# Altium PCB Mouse_Send.PcbDoc
Units mil, origin at the board's own origin, x right, y up, seen from the top; angles counter-clockwise.
Board outline 1771.65 x 2952.76 mil, 2 copper layers (Top Layer, Bottom Layer); 75 components, 53 nets, 303 pads, 192 vias.
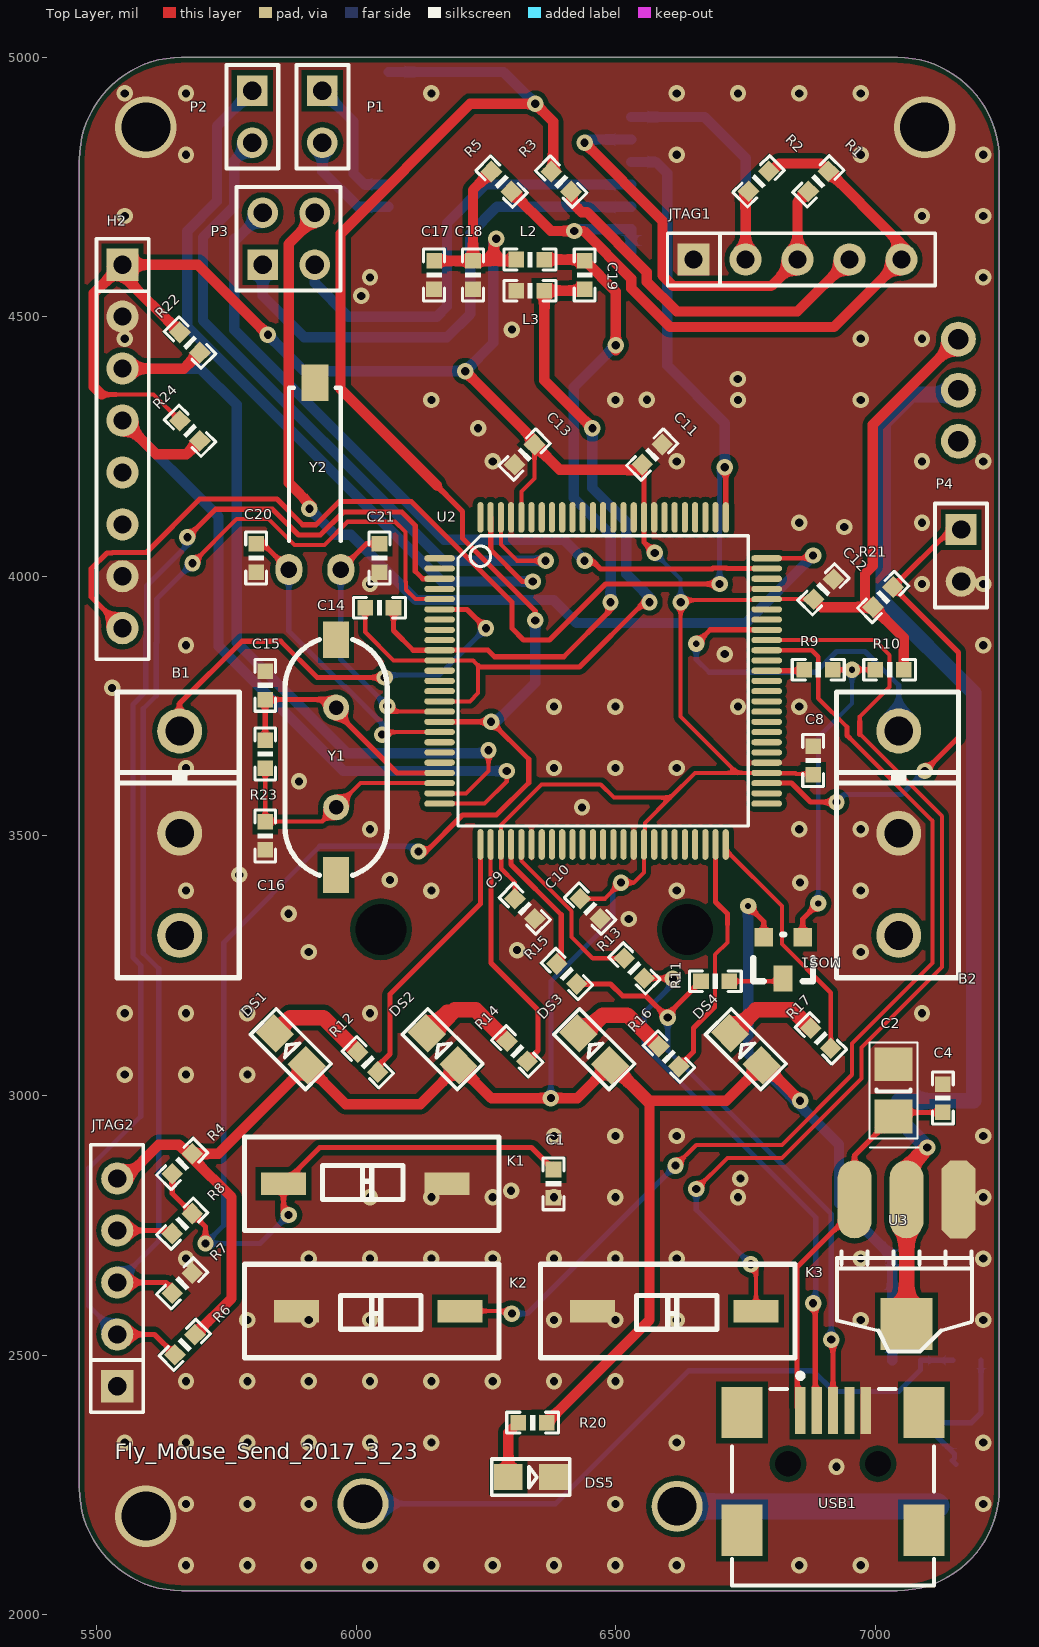
[diagram p0: Top Layer view]
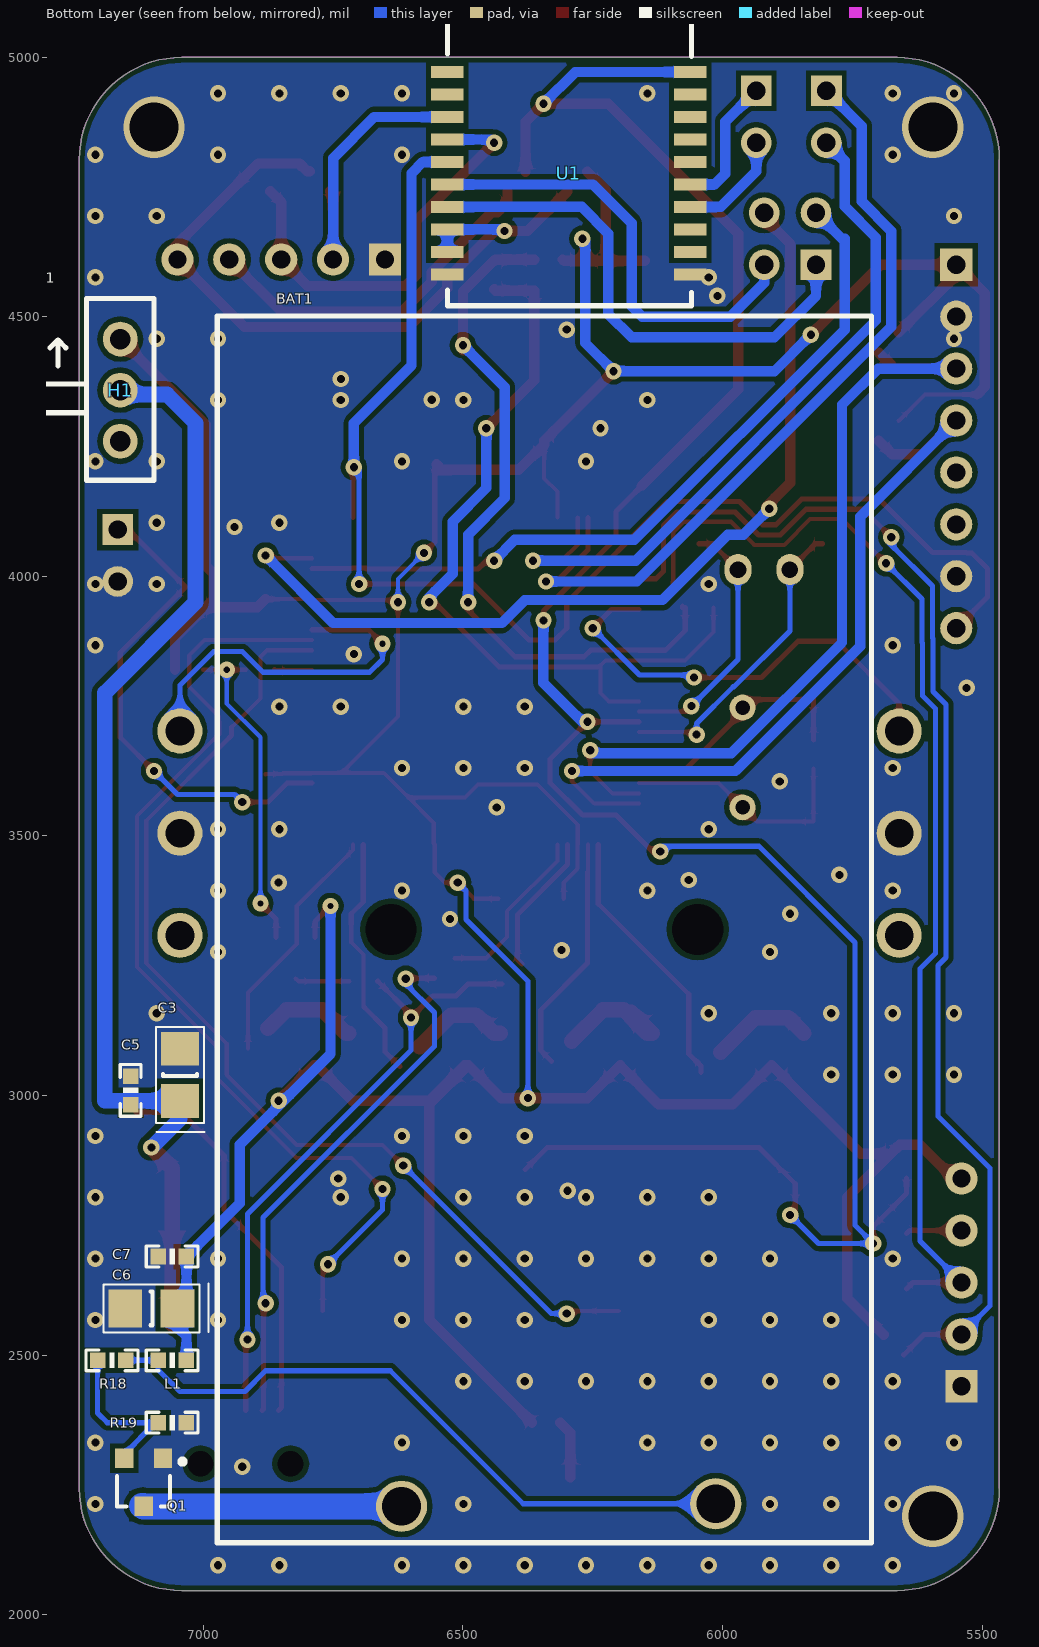
[diagram p1: Bottom Layer view, seen from below]

## Layer stack, top to bottom
Top Solder: solder mask 0.4, Solder Resist, Dk 3.5
Top Layer: signal copper 1.4
Dielectric 1: dielectric 12.6, FR-4, Dk 4.8
Bottom Layer: signal copper 1.4
Bottom Solder: solder mask 0.4, Solder Resist, Dk 3.5

## Board outline
5467.03,2243.39 ccw(c5663.88,2243.39) 5663.88,2046.54 7041.83,2046.54 ccw(c7041.83,2243.39) 7238.68,2243.39 7238.68,4802.44 ccw(c7041.83,4802.44) 7041.83,4999.29 5663.88,4999.29 ccw(c5663.88,4802.44) 5467.03,4802.44

## Design rules (kind name [scope] priority, off if disabled: settings)
Clearance Clearance_1 [All] p1: gap=10 except(5: SMDPad-SMDPad; 8: Track-SMDPad)
Clearance [All] p2: gap=10
MinimumSolderMaskSliver MinimumSolderMaskSliver_USB [HasFootprint('USB/SM0.8-6H5')] p1: minsoldermaskwidth=2
MinimumSolderMaskSliver MinimumSolderMaskSliver_TQFP100 [HasFootprint('TQFP-100') vs InPadClass('All Pads')] p2: minsoldermaskwidth=5
MinimumSolderMaskSliver [All] p3: minsoldermaskwidth=5
PolygonConnect [All] p1: connectstyle=Direct reliefconductorwidth=10 reliefentries=4 polygonreliefangle="90 Angle" airgapwidth=10
RoutingVias [All] p1: holewidth=28 width=50 viastyle="Through Hole" minholewidth=28 minwidth=50 maxholewidth=28 maxwidth=50
SilkToSilkClearance [All] p1: silktosilkclearance=0
SilkToSolderMaskClearance SilkToSolderMaskClearance_1 [IsPad] p1: minsilkscreentomaskgap=0 clearancetoexposedcopper=TRUE
SilkToSolderMaskClearance [IsPad] p2: minsilkscreentomaskgap=10 clearancetoexposedcopper=TRUE
SolderMaskExpansion [All] p1: expansion=4
Width [All] p1: maxlimit=1000 minlimit=8 preferedwidth=20
27 further rules are at their usual default settings.

## Components (designator, comment, footprint, x,y, rotation, side; value= is the part's Value field where it differs from the comment)
B1 "Button_Mouse_3" BUTTON_MOUSE_3 5660,3701.99 r270 top
B2 "Button_Mouse_3" BUTTON_MOUSE_3 7045,3701.99 r270 top
BAT1 "BATT" BAT_NUM5_2 5713.18,2138.9 r0 bottom locked
C1 "104" 0603P 6380,2830 r90 top
C2 "10uF" TAJ_A 7035,3010 r90 top
C3 "10uF" TAJ_A 7045,3039.8 r90 bottom
C4 "104" 0603P 7130,2995 r270 top
C5 "104" 0603P 7140,3010 r270 bottom
C6 "10uF" TAJ_A 7100,2590 r0 bottom
C7 "104" 0603P 7060,2690 r180 bottom
C8 "104" 0603P 6880,3645 r90 top
C9 "104" 0603P 6325,3360 r315 top
C10 "104" 0603P 6450.6,3360 r315 top
C11 "104" 0603P 6570,4234.49 r45 top
C12 "104" 0603P 6900,3975 r45 top
C13 "104" 0603P 6324.49,4234.4 r225 top
C14 "104" 0603P 6045,3939.38 r180 top
C15 "22" 0603P 5825,3790 r270 top
C16 "22" 0603P 5825,3500 r90 top
C17 "104" 0603P 6150,4579.94 r90 top
C18 "104" 0603P 6225,4579.94 r90 top
C19 "104" 0603P 6440,4579.94 r90 top
C20 "22" 0603P 5807.31,4035 r90 top
C21 "22" 0603P 6045,4035 r90 top
DS1 "" SMDLED 5904.98,3058.41 r135 top
DS2 "" SMDLED 6197.15,3058.41 r135 top
DS3 "" SMDLED 6489.33,3058.41 r135 top
DS4 "" SMDLED 6781.5,3058.41 r135 top
DS5 "POWER" SMDLED 6292.96,2265.06 r0 top
H1 "" KEY_B 7160,4260 r90 bottom
H2 "Header 8" "HEADER 8" 5550,4250 r270 top
JTAG1 "SWD" HEAD5 6850,4610 r0 top
JTAG2 "SWD" HEAD5 5540,2640 r90 top
K1 "KEY3" KEY2 5860,2830 r0 top
K2 "KEY3" KEY2 6200,2585 r180 top
K3 "KEY3" KEY2 6769.96,2585 r180 top
L1 "221" 0603P 7060,2490.13 r180 bottom
L2 "221" 0603P 6335,4610 r0 top
L3 "221" 0603P 6335,4550 r0 top
MOS1 "SI2301" SOT-23#1 6860,3305 r180 top
P1 "" HDR1X2 5935,4935 r270 top
P2 "" HDR1X2 5800,4935 r270 top
P3 "USART1" HDR2X2 5820,4600 r0 top
P4 "Header 2" HDR1X2 7165,4090 r270 top
Q1 "MOSFET-N" SOT-23#2 7115,2255 r0 bottom
R1 "10K" 0603P 6890,4760.6 r45 top
R2 "10K" 0603P 6775,4760.6 r45 top
R3 "33" 0603P 6395,4760 r135 top
R4 "10K" 0603P 5665,2868.34 r45 top
R5 "0" 0603P 6280,4760 r135 top
R6 "10K" 0603P 5670,2520 r45 top
R7 "10K" 0603P 5665,2638.33 r45 top
R8 "33" 0603P 5665,2753.34 r45 top
R9 "1K" 0603P 6890,3820.06 r0 top
R10 "10K" 0603P 7027.5,3819.94 r180 top
R11 "1.5K" 0603P 6691.7,3220 r180 top
R12 "510" 0603P 6022.55,3064.09 r135 top
R13 "33" 0603P 6535.91,3244.9 r135 top
R14 "510" 0603P 6310.25,3085 r135 top
R15 "33" 0603P 6405.91,3234.09 r135 top
R16 "510" 0603P 6602.42,3075 r135 top
R17 "510" 0603P 6895,3110 r135 top
R18 "1K" 0603P 7176.01,2490 r0 bottom
R19 "100K" 0603P 7060,2370 r180 bottom
R20 "1K" 0603P 6340,2370 r180 top
R21 "10K" 0603P 7015.1,3960 r225 top
R22 "4.7K" 0603P 5680,4450 r135 top
R23 "1M" 0603P 5825.13,3657.5 r270 top
R24 "4.7K" 0603P 5680,4280 r135 top
U1 "ZLG9021P0-1" ZLG9021P0-1 6305,4846.11 r180 bottom locked
U2 "LPC1765" TQFP-100 6161.07,4034.25 r0 top locked
U3 "1117" AMS1117 7160.03,2799.94 r180 top
USB1 "USB-B(Mini)" USB/SM0.8-6H5 6918.39,2084.16 r270 top
Y1 "12MHz" XTAL_US 5961.5,3555 r90 top
Y2 "32.768KHz" CRY-32 5970,4013.32 r90 top

## Footprints (in the part's own frame and the unit in brackets; to place one, negate y for a bottom-side part, rotate by r counter-clockwise, add the part's x,y. Pads: shape width x height; smd on the part's side, far side on the other; paste and mask are expansions set on the pad)
0603P [mil]
  rect 30x30 smd: 1(-27,0) 2(27.5,-0.06)
  silkscreen extent -50,-20 50,20
AMS1117 [mil]
  oct 65x150 smd: 1(0.03,-0.06)
  oval 65x150 smd: 2(100.03,-0.06) 3(200.03,-0.06)
  rect 100x100 smd: 4(100.03,239.94)
  silkscreen extent -26,100 234,293
BAT_NUM5_2 [mm]
  round 2.5 hole 1.9: 1(7.62,-1.905) 2(22.987,-1.778)
  round 0 hole 2.5: ""(8.5,-30) ""(23.5,-30)
  silkscreen extent 0,-60 32,0
BUTTON_MOUSE_3 [mm]
  round 2.2 hole 1.4: 1(0,0) 2(5,0) 3(10,0)
  silkscreen extent -1.91,-3.05 12.06,2.92
CRY-32 [mil]
  rect 70x52 smd: 0(359.61,49.61)
  oval 60x52 hole 32: 1(-0.4,-0.39) 2(-0.4,99.61)
  silkscreen extent 55,0 350,100
HDR1X2 [mm]
  rect 1.5x1.5 hole 0.9: 1(0,0)
  round 1.5 hole 0.9: 2(2.54,0)
  silkscreen extent -1.27,-1.27 3.81,1.27
HDR2X2 [mm]
  rect 1.5x1.5 hole 0.9: 1(0,0)
  round 1.5 hole 0.9: 2(0,2.54) 3(2.54,0) 4(2.54,2.54)
  silkscreen extent -1.27,-1.27 3.81,3.81
HEAD5 [mil]
  rect 62x62 hole 35: 1(-200,0)
  round 62 hole 35: 2(-100,0) 3(0,0) 4(100,0) 5(200,0)
  silkscreen extent -250,-50 265,51
"HEADER 8" [mil]
  rect 62x62 hole 35: 1(-350,0)
  round 62 hole 35: 2(-250,0) 3(-150,0) 4(-50,0) 5(50,0) 6(150,0) 7(250,0) 8(350,0)
  silkscreen extent -400,-50 410,51
KEY2 [mm]
  rect 2.2x1.1 smd: 1(0,0) 2(8,0)
  silkscreen extent -1.91,-2.29 10.54,2.29
KEY_B [mm]
  round 1.7 hole 1: 1(0,0) 2(2.5,0) 3(5,0)
  silkscreen extent -1.91,-1.65 6.98,4.19
SMDLED [mm]
  rect 1.4x1.27 smd: 1(0.001,-0.002) 2(2.211,-0.002)
  silkscreen extent -0.8,-0.89 3.01,0.89
SOT-23#1 [mil]
  rect 36x36 smd: 1(0,0) 2(75,0)
  rect 36x50 smd: 3(38,80)
  silkscreen extent -20,-5 95,85
SOT-23#2 [mil]
  rect 35.43x37.4 smd: 1(-37.4,-46.26) 2(37.4,-46.26) 3(0,46.26)
  silkscreen extent -80,-45 51,46
TAJ_A [mm] "Chip Capacitor, 2-Leads, Body 3.2x1.7mm, IPC Medium Density"
  rect 1.65x1.85 smd: 1(-1.275,0) 2(1.275,0)
  silkscreen extent -2.79,-1.21 2.35,1.17, body extent -1.7,-0.9 1.7,0.9, height 1.8
TQFP-100 [mm]
  oval 1.5x0.3 smd: 1(-0.01,0.01) 2(-0.01,-0.49) 3(-0.01,-0.99) 4(-0.01,-1.49) 5(-0.01,-1.99) 6(-0.01,-2.49) 7(-0.01,-2.99) 8(-0.01,-3.49) 9(-0.01,-3.99) 10(-0.01,-4.49) 11(-0.01,-4.99) 12(-0.01,-5.49) 13(-0.01,-5.99) 14(-0.01,-6.49) 15(-0.01,-6.99) 16(-0.01,-7.49) 17(-0.01,-7.99) 18(-0.01,-8.49) 19(-0.01,-8.99) 20(-0.01,-9.49) 21(-0.01,-9.99) 22(-0.01,-10.49) 23(-0.01,-10.99) 24(-0.01,-11.49) 25(-0.01,-11.99) 51(15.99,-11.99) 52(15.99,-11.49) 53(15.99,-10.99) 54(15.99,-10.49) 55(15.99,-9.99) 56(15.99,-9.49) 57(15.99,-8.99) 58(15.99,-8.49) 59(15.99,-7.99) 60(15.99,-7.49) 61(15.99,-6.99) 62(15.99,-6.49) 63(15.99,-5.99) 64(15.99,-5.49) 65(15.99,-4.99) 66(15.99,-4.49) 67(15.99,-3.99) 68(15.99,-3.49) 69(15.99,-2.99) 70(15.99,-2.49) 71(15.99,-1.99) 72(15.99,-1.49) 73(15.99,-0.99) 74(15.99,-0.49) 75(15.99,0.01)
  oval 0.3x1.5 smd: 26(1.99,-13.99) 27(2.49,-13.99) 28(2.99,-13.99) 29(3.49,-13.99) 30(3.99,-13.99) 31(4.49,-13.99) 32(4.99,-13.99) 33(5.49,-13.99) 34(5.99,-13.99) 35(6.49,-13.99) 36(6.99,-13.99) 37(7.49,-13.99) 38(7.99,-13.99) 39(8.49,-13.99) 40(8.99,-13.99) 41(9.49,-13.99) 42(9.99,-13.99) 43(10.49,-13.99) 44(10.99,-13.99) 45(11.49,-13.99) 46(11.99,-13.99) 47(12.49,-13.99) 48(12.99,-13.99) 49(13.49,-13.99) 50(13.99,-13.99) 76(13.99,2.01) 77(13.49,2.01) 78(12.99,2.01) 79(12.49,2.01) 80(11.99,2.01) 81(11.49,2.01) 82(10.99,2.01) 83(10.49,2.01) 84(9.99,2.01) 85(9.49,2.01) 86(8.99,2.01) 87(8.49,2.01) 88(7.99,2.01) 89(7.49,2.01) 90(6.99,2.01) 91(6.49,2.01) 92(5.99,2.01) 93(5.49,2.01) 94(4.99,2.01) 95(4.49,2.01) 96(3.99,2.01) 97(3.49,2.01) 98(2.99,2.01) 99(2.49,2.01) 100(1.99,2.01)
  silkscreen extent 0.89,-13.09 15.09,1.11
USB/SM0.8-6H5 [mm]
  rect 2.3x0.5 smd: 1(-7.85,-1.6) 2(-7.85,-0.8) 3(-7.85,0) 4(-7.85,0.8) 5(-7.85,1.6)
  rect 2.5x2 smd: 6(-7.75,4.45) 7(-1.996,4.45) 8(-7.75,-4.45) 9(-1.996,-4.45)
  round 0.6 hole 1.27 unplated: MH1(-5.25,2.2) MH2(-5.25,-2.2)
  silkscreen extent -9.67,-4.95 0.7,4.95
XTAL_US [mil]
  round 50 hole 28: 1(0,0) 2(192.13,0)
  rect 70x50 smd: ""(-130.32,0) ""(322.44,0)
  silkscreen extent -131,-98 323,98
ZLG9021P0-1 [mm]
  rect 1.6x0.6 smd: 1(-5.715,3.175) 2(-5.715,2.075) 3(-5.715,0.975) 4(-5.715,-0.125) 5(-5.715,-1.225) 6(-5.715,-2.325) 7(-5.715,-3.425) 8(-5.715,-4.525) 9(-5.715,-5.625) 10(-5.715,-6.725) 10(-5.715,-6.725) 11(6.165,-6.725) 11(6.165,-6.725) 12(6.165,-5.625) 13(6.165,-4.525) 14(6.165,-3.425) 15(6.165,-2.325) 16(6.165,-1.225) 17(6.165,-0.125) 18(6.165,0.975) 19(6.165,2.075) 20(6.165,3.175)
  silkscreen extent -5.72,-8.26 6.22,9.5

## Part data
BAT1: library part BAT
C1 C4 C5 C7 C8 C9 C10 C11 C12 C13 C14 C15 C16 C17 C18 C19 C20 C21: library part C
C2 C3 C6: library part CAP
DS1 DS2 DS3 DS4 DS5: library part LED2, "Typical RED, GREEN, YELLOW, AMBER GaAs LED"
H1: library part "Header 3"
L1 L2 L3: library part Inductor
MOS1: library part MOS-P, "IRLML6401/SI2301"
P1 P2: library part "Header 2"
P3: library part "Header 2X2", "Header, 2-Pin, Dual row"
Q1: "N-Channel MOSFET"
R1 R2 R3 R4 R5 R6 R7 R8 R9 R10 R11 R12 R13 R14 R15 R16 R17 R18 R19 R20 R21 R22 R23 R24: library part R
USB1: library part USB5
Y1 Y2: library part CRYSTAL, "Crystal"

## Via types
v1: diameter 31.5, hole 15.75, Top Layer to Bottom Layer, tented both sides, 185 vias
v2: diameter 31.5, hole 11.81, Top Layer to Bottom Layer, tented both sides, 4 vias
v3: diameter 118.11, hole 94.49, Top Layer to Bottom Layer, 3 vias

## Nets (pads, with @x,y where several pads share a name; then routed paths per layer and width w, separated by ;. In a path a pad name is that pad's centre, name@x,y a point inside that pad or via, vN(x,y) a via of type N, cw(c..) or ccw(c..) an arc to the next point about the centre after c; other vN are vias at no path point)
9021_TCK: JTAG1.3 R1.1 U1.4 | length 839.9
  Top Layer w20: v1(6440,4835) 6590,4685 6590,4579.72 6610.72,4559 6799,4559 JTAG1.3 6850,4720.6 R1.1
  Bottom Layer w20: v1(6440,4835) 6446.19,4841.19 U1.4
9021_TMS: JTAG1.2 R2.1 U1.3 | length 581.9
  Top Layer w20: JTAG1.2 6750,4735.6 R2.1
  Bottom Layer w20: U1.3 6670.5,4884.5 6750,4805 JTAG1.2
9201_RX0: P3.3 U1.6 | length 871.1
  Bottom Layer w20: P3.3 5920,4565 5985,4500 6155,4500 6175,4520 6175,4680 6249.58,4754.58 U1.6
9201_TX0: P3.1 U1.7 | length 998
  Bottom Layer w20: P3.1 5820,4540 5900,4460 6175,4460 6220,4505 6220,4660 6271.27,4711.27 U1.7
A_GND: C14.2 C19.1 L3.2 U2.11 U2.15 | length 1570.9
  Top Layer w8: C14.2 6017.5,3892.5 6072.19,3837.81 U2.11 6225.46,3837.81 6235,3828.27 6235,3775 6219.07,3759.07 U2.15
  Top Layer w10: 6235,3828.27 6238.27,3825 6430,3825 6555,3950 v1(6565,3950)
  Top Layer w20: C19.1 6437,4549.94 L3.2 6362.5,4377.5 v1(6455,4285)
  Bottom Layer w20: v1(6455,4285) 6455,4170 6520,4105 6520,4005 6565,3960 v1(6565,3950)
A_VCC_3V3: C14.1 C19.2 L2.2 U2.10 | length 1372.8
  Top Layer w10: C14.1 6072,3895.49 6110,3857.49 U2.10 6161.45,3858.27 6253.44,3858.27 6266.72,3845 6400,3845 6490,3935 v1(6490,3950) ; C14.1@6077,3939.39 C14.1@6077,3942.29
  Top Layer w20: L2.2 6437.56,4609.94 C19.2 6440.96,4607.44 6500,4548.39 v1(6500,4445) v1@6500,4435
  Bottom Layer w20: v1(6490,3950) 6490,4080 6419.25,4150.75 6419.25,4364.25 v1(6500,4445)
D+: R11.2 R15.1 USB1.3 | length 1187.2
  Top Layer w10: R15.1 6490,3215 6513.4,3191.6 6558.4,3191.6 v1(6600,3150) 6600,3155.86 R11.2 ; v1(6915,2530) 6918.39,2526.61 USB1.3
  Bottom Layer w10: v1(6600,3150) 6600,3087.08 6915,2772.08 v1(6915,2530)
GND: B1.2 B2.2 C1.1 C2.2 C3.2 C4.1 C5.1 C6.2 C7.1 C8.2 C9.2 C10.2 C11.2 C12.2 C13.2 C15.1 C16.1 C17.1 C18.1 C20.1 C21.1 DS5.2 H2.2 H2.7 JTAG1.1 JTAG2.1 K1.2 K2.2 K3.2 L3.1 P4.2 Q1.1 R7.2 R19.2 U1.10 U1.11 U2.31 U2.41 U2.55 U2.72 U2.83 U2.97 U3.1 USB1.5
  other v1: 5672.44,2095.35 5790.55,2095.35 5908.66,2095.35 6026.77,2095.35 6144.88,2095.35 6262.99,2095.35 6381.1,2095.35 6499.21,2095.35 6617.32,2095.35 6853.54,2095.35 6971.65,2095.35 5672.44,2213.46 5790.55,2213.46 5908.66,2213.46 6499.21,2213.46 7207.87,2213.46 6925,2285 5554.33,2331.57 5672.44,2331.57 5790.55,2331.57 5908.66,2331.57 6026.77,2331.57 6144.88,2331.57 6617.32,2331.57 7207.87,2331.57 5672.44,2449.68 5790.55,2449.68 5908.66,2449.68 6026.77,2449.68 6144.88,2449.68 6262.99,2449.68 6381.1,2449.68 6499.21,2449.68 5790.55,2567.8 5908.66,2567.8 6026.77,2567.8 6381.1,2567.8 6499.21,2567.8 6617.32,2567.8 6971.65,2567.8 7207.87,2567.8 5672.44,2685.91 5908.66,2685.91 6026.77,2685.91 6144.88,2685.91 6262.99,2685.91 6381.1,2685.91 6499.21,2685.91 6617.32,2685.91 6971.65,2685.91 7207.87,2685.91 6026.77,2804.02 6144.88,2804.02 6262.99,2804.02 6381.1,2804.02 6499.21,2804.02 6735.43,2804.02 7207.87,2804.02 6298.5,2816.5 6740,2840 6381.1,2922.13 6499.21,2922.13 6617.32,2922.13 7207.87,2922.13 5554.33,3040.24 5672.44,3040.24 5790.55,3040.24 5554.33,3158.35 5672.44,3158.35 5790.55,3158.35 6026.77,3158.35 7089.76,3158.35 5908.66,3276.46 6971.65,3276.46 6310,3280 6525,3340 5870,3350 5672.44,3394.57 6144.88,3394.57 6617.32,3394.57 6971.65,3394.57 6855,3410 6065,3415 5775,3425 6026.77,3512.68 6853.54,3512.68 6971.65,3512.68 6435,3555 5890,3605 5672.44,3630.79 6381.1,3630.79 6499.21,3630.79 6617.32,3630.79 6381.1,3748.9 6499.21,3748.9 6735.43,3748.9 6853.54,3748.9 5530,3785 6710,3850 5672.44,3867.01 7207.87,3867.01 6026.77,3985.12 7089.76,3985.12 7207.87,3985.12 6940,4095 6853.54,4103.23 7089.76,4103.23 6262.99,4221.34 6617.32,4221.34 7089.76,4221.34 7207.87,4221.34 6235,4285 6144.88,4339.45 6499.21,4339.45 6735.43,4339.45 6971.65,4339.45 6560,4340 6735,4380 5554.33,4457.56 6971.65,4457.56 7089.76,4457.56 6300,4475 6010,4540 6026.77,4575.67 7207.87,4575.67 5554.33,4693.78 7089.76,4693.78 7207.87,4693.78 5672.44,4811.89 6617.32,4811.89 6971.65,4811.89 7207.87,4811.89 5554.33,4930 5672.44,4930 6144.88,4930 6617.32,4930 6735.43,4930 6853.54,4930 6971.65,4930
  other v3: 5595,2190 5595,4865 7095,4865
ISP: P4.1 R21.1 U2.53 | length 959.3
  Top Layer w10: U2.53 6838.41,3601.59 6875,3565 v1(6925,3565) ; v1(7095,3625) 7160,3690 7160,3853.28 R21.1 7145.1,4090 P4.1
  Bottom Layer w10: v1(6925,3565) 6940,3580 7050,3580 v1(7095,3625) v1@7095,3630
KEY0: B1.1 U2.6 | length 865.4
  Top Layer w10: B1.1 5660,3755 5780,3875 5855,3875 5925,3805 v1(6055,3805) ; U2.6 6213.77,3936.23 v1(6250,3900)
  Bottom Layer w10: v1(6055,3805) 6060,3810 6160,3810 v1(6250,3900)
KEY1: B2.1 U2.68 | length 709
  Top Layer w10: v2(6655,3870) 6681.86,3896.86 U2.68 U2.68@6790.9,3897.18
  Bottom Layer w10: v2(6655,3870) 6655,3840 6680,3815 6885,3815 6925,3855 6980,3855 7045,3790 B2.1
KEY2: K3.1 U2.67 | length 1905.9
  Top Layer w8: v1(6655,2820) 6715,2880 6820.46,2880 6973,3032.54 6973,3092.54 7128,3247.54 7128,3537.95 6970,3695.95 ; v1(6760,2675) 6769.96,2665.04 K3.1 ; U2.67 6997.82,3877.18 7027,3848 7027,3787 6970,3730 6970,3720
  Top Layer w10: 6970,3695.95 6970,3720
  Bottom Layer w10: v1(6655,2820) 6655,2780 v1(6760,2675)
KEY3: K2.1 U2.66 | length 2012.8
  Top Layer w8: K2.1 6295,2585 v1(6300,2580) ; v1(6615,2865) 6655,2905 6820,2905 6955,3040 6955,3100 7110,3255 7110,3529.08 6950,3689.08 ; U2.66 6877.51,3857.49 6890,3845 6890,3765 6945,3710 6945.5,3710
  Top Layer w10: 6945.5,3710 6945.5,3693.57 6950,3689.08
  Bottom Layer w10: v1(6300,2580) 6330,2580 v1(6615,2865)
LED0: R12.1 U2.26 | length 520.4
  Top Layer w10: R12.1 6041.64,3056.64 6065,3080 6065,3195 6239.41,3369.41 U2.26
LED1: R14.1 U2.27 | length 463.8
  Top Layer w8: U2.27 6259.1,3430.91 6260,3430
  Top Layer w10: 6260,3430 6260,3255 6350,3165 6350,3086.57 R14.1
LED2: R16.1 U2.49 | length 475.8
  Top Layer w8: 6690,3170 6691.2,3171.2 6691.2,3271.2 6715,3295 6715,3330
  Top Layer w10: R16.1 6650,3084.39 6650,3130 6690,3170 ; U2.49 6692.16,3372.84 6715,3350 6715,3330
LED3: R17.1 U2.50 | length 476.3
  Top Layer w8: U2.50 6711.85,3473.15 6820,3365 6820,3292.03 6914.09,3197.94 R17.1
LPC_RX0: P2.1 U2.99 | length 1543.3
  Top Layer w10: U2.99 6259.1,4050.91 6320,3990 v1(6340,3990)
  Bottom Layer w20: P2.1 5731.95,4866.95 5731.95,4721.81 5675,4664.85 5675,4480.15 6165.15,3990 v1(6340,3990)
LPC_RX1: P3.2 U2.74 | length 1468.3
  Top Layer w10: v1(6440,4030) 6455,4030 6470.75,4014.25 6685.77,4014.25 6687.26,4015.75 6712.74,4015.75 6713.78,4014.71 6790.32,4014.71 U2.74
  Bottom Layer w20: P3.2 5770,4650 5765,4650 5765,4475 6170,4070 6400,4070 v1(6440,4030)
LPC_TX0: P2.2 U2.98 | length 1384.7
  Top Layer w8: U2.98 6278.78,4061.22 6310,4030 v1(6365,4030)
  Bottom Layer w20: P2.2 5765,4800 5765,4712.43 5705,4652.43 5705,4492.57 6167.57,4030 v1(6365,4030)
LPC_TX1: P3.4 U2.75 | length 1815.9
  Top Layer w8: U2.75 6874.66,4034.66 v1(6880,4040)
  Top Layer w20: v1@5915,4135 5870,4180 5870,4640 5920,4690 P3.4
  Bottom Layer w20: v1(5910,4130) 5960,4080 5990,4080 6115.75,3954.25 6380.75,3954.25 6425,3910 6750,3910 v1(6880,4040) v1@6885,4040
MPU6050_INT0: H2.8 U1.5 U2.76 | length 2645.3
  Top Layer w10: H2.8 5490,3960 5490,4015 5520,4045 5529.95,4045 5530.95,4046 5596,4046 5699,4149 5847.52,4149 5897.26,4099.25 5922.74,4099.25 5967.48,4144 6106,4144 6300,3950 6300,3900 6322.5,3877.5 6372.5,3877.5 6480,3985 v1(6700,3985) ; v1(6710,4210) 6711.85,4208.15 U2.76
  Bottom Layer w10: v1(6700,3985) 6700,4200 v1(6710,4210)
  Bottom Layer w20: U1.5 6577.12,4797.88 6599,4776 6599,4406 6710,4295 v1(6710,4210)
NetBAT1_1: BAT1.1 L1.1 R18.1 | length 1294.1
  Bottom Layer w10: BAT1.1 6383.9,2213.9 6640,2470 6880,2470 6920,2430 7045,2430 7087,2472 L1.1 7148.88,2490.13 R18.1
NetBAT1_2: BAT1.2 Q1.3 | length 499.9
  Bottom Layer w50: BAT1.2 6618.34,2208.74 Q1.3 ; Q1.3@7115,2210 Q1.3@7118,2210
NetC2_1: C2.1 C4.2 U3.3 USB1.1 | length 744.2
  Top Layer w10: USB1.1 6849.25,2399.37 6849.25,2669.25 6960,2780 6960,2884.8 C2.1 7042.7,2967.5 C4.2
NetC3_1: C3.1 C5.2 H1.2 U3.2 U3.4 | length 2162.6
  Top Layer w30: U3.4 7060,2860 v1(7100,2900)
  Bottom Layer w30: v1(7100,2900) 7045,2955 C3.1 7189.61,2989.61 7189.61,3775.39 7015,3950 7015,4295 7070,4350 7151.57,4350 H1.2
NetDS1_2: DS1.2 R12.2 | length 199.6
  Top Layer w30: DS1.2 5873.48,3150 5936.73,3150 R12.2
NetDS2_2: DS2.2 R14.2 | length 255.5
  Top Layer w30: 6175.65,3160 DS2.2 6145,3120 6190,3165 6230.34,3165 R14.2
NetDS3_2: DS3.2 R16.2 | length 194.8
  Top Layer w30: DS3.2 6440,3120 6475,3155 6522.51,3155 R16.2
NetDS4_2: DS4.2 R17.2 | length 188.9
  Top Layer w30: DS4.2 6725,3120 6770,3165 6840.09,3165 R17.2
NetDS5_1: DS5.1 R20.2 | length 113.1
  Top Layer w20: DS5.1 6292.99,2350.56 R20.2
NetJTAG1_4: JTAG1.4 R3.1 | length 695.3
  Top Layer w20: R3.1 6414.09,4720.91 6434.25,4700.75 6444.63,4700.75 6560,4585.38 6560,4567.29 6617.29,4510 6850,4510 JTAG1.4
NetMOS1_1: MOS1.1 R9.2 R10.2 | length 636.8
  Top Layer w8: R9.2 v2(6955,3820) R10.2
  Top Layer w10: MOS1.1 6860,3340 v2(6890,3370)
  Bottom Layer w8: v2(6890,3370) 6890,3690 6955,3755 v2(6955,3820)
NetMOS1_3: MOS1.3 R11.1 | length 105.4
  Top Layer w8: R11.1 6817,3220 MOS1.3
NetQ1_2: Q1.2 R18.2 R19.1 | length 329.3
  Bottom Layer w10: R19.1 R19.1@7092,2370 ; Q1.2@7148.07,2296.93 Q1.2@7155,2290 ; Q1.2 7152.4,2309.6 R19.1@7092,2370 ; R18.2 7203.51,2388.51 7185,2370 R19.1@7092,2370
NetR13_1: R13.1 USB1.2 | length 1059.4
  Top Layer w10: R13.1 6609.19,3225.81 v1(6610,3225) ; v1(6880,2600) 6884.25,2595.75 6884.25,2395.86 USB1.2
  Bottom Layer w10: v1(6610,3225) 6610,3215 6555,3160 6555,3095 6885,2765 v1@6885,2590
OSC_32K_IN: C21.2 U2.16 Y2.1 | length 500.3
  Top Layer w8: v1(6060,3750) 6070.62,3739.38 U2.16
  Top Layer w10: Y2.1 6019.96,4062.5 C21.2
  Bottom Layer w10: Y2.1 5970.39,3839.61 v1(6060,3750)
OSC_32K_OUT: C20.2 U2.18 Y2.2 | length 589.5
  Top Layer w8: v1(6050,3695) 6055.01,3700.01 U2.18
  Top Layer w10: C20.2 5820.81,4062.5 Y2.2
  Bottom Layer w10: Y2.2 5870.39,3894.61 5977.87,3787.13 5979.39,3787.13 6050,3716.52 v1(6050,3695)
OSC_IN: C15.2 R23.1 U2.22 Y1.2 | length 477.4
  Top Layer w10: R23.1 5824.94,3684.69 C15.2 5946.13,3762.5 Y1.2 5961.5,3738.5 6078.73,3621.27 U2.22
OSC_OUT: C16.2 R23.2 U2.23 Y1.1 | length 468.8
  Top Layer w8: R23.2 C16.2 5934,3527.5 Y1.1 6008.09,3601.59 U2.23
P2_9: R9.1 U2.64 | length 73.2
  Top Layer w10: U2.64 6861.06,3818.12 R9.1
RESET: C1.2 K1.1 R3.2 R4.1 R8.2 U1.20 U2.17 | length 4588.6
  Top Layer w10: R4.1@5645.91,2840.91 5645.91,2811.32 5710,2747.23 v1@5710,2725 ; v1(5870,2770) 5860,2780 K1.1 5930,2900 6337.56,2900 C1.2 ; v1(6120,3470) 6135,3470 6205,3540 6270,3540 6332.5,3602.5 6332.5,3647.5 v1(6260,3720) 6259.7,3719.7 U2.17 ; 6155,4175 6205,4125 6205,4073.28 6345,3933.28 v1(6345,3915)
  Top Layer w20: 6155,4175 5970,4360 5970,4660 6220,4910 v1(6345,4910) 6379.49,4875.51 R3.2@6379.49,4779.4
  Bottom Layer w10: v1(5870,2770) 5815,2715 v1(5710,2715) 5745,2750 5745,3295 5930,3480 6110,3480 v1(6120,3470)
  Bottom Layer w20: U1.20 6283.89,4971.11 v1(6345,4910) ; v1(6260,3720) 6270,3720 6345,3795 v1(6345,3915)
RX1: P1.1 U1.15 | length 260.6
  Bottom Layer w20: P1.1 5995,4875 5995,4775 6015.42,4754.58 U1.15
SCL0: H2.3 R22.1 U2.24 | length 1596.3
  Top Layer w8: U2.24 6211.9,3581.9 6255,3625 v1(6255,3665)
  Top Layer w20: H2.3 5668.18,4400 R22.1
  Bottom Layer w20: H2.3 5700,4400 5770,4330 5770,3872.43 5983.17,3659.25 6249.25,3659.25 v1(6255,3665)
SDA0: H2.4 R24.1 U2.25 | length 1519.8
  Top Layer w8: U2.25 6247.22,3562.22 6290,3605 v1(6290,3625)
  Top Layer w20: H2.4 5615,4235 5673.18,4235 R24.1
  Bottom Layer w20: H2.4 5735,4115 5735,3865 5975,3625 v1(6290,3625)
TCK: JTAG2.3 R7.1 U2.5 | length 2257.2
  Top Layer w8: v1(5685,4025) 5770,4110 5831.36,4110 5881.11,4060.25 5938.89,4060.25 5983.64,4105 6075,4105 6095,4085 6095,3990 6096,3989 6096,3974 6114.08,3955.92 U2.5
  Top Layer w10: JTAG2.3 5633.49,2640 R7.1@5645.91,2627.58
  Bottom Layer w10: JTAG2.3 5620,2720 5620,3244 5590,3274 5590,3745 5615,3770 5615,3871.66 5616,3872.66 5616,3956 v1(5685,4025)
TMS: JTAG2.2 R6.1 U2.3 | length 2428.2
  Top Layer w10: JTAG2.2 5611.82,2540 R6.1 ; v1(5675,4075) 5729,4129 5839.23,4129 5888.98,4079.25 5931.02,4079.25 5975.77,4124 6087.87,4124 6114,4097.87 6114,4009.74 6128.45,3995.29 U2.3
  Bottom Layer w10: JTAG2.2 5485,2595 5485,2860 5585.08,2960.08 5585.08,3250.64 5570,3265.72 5570,3753.28 5595,3778.28 5595,3879.95 5596,3880.95 5596,3981 5675,4060 v1(5675,4075)
TRST: JTAG2.4 R8.1 | length 108.3
  Top Layer w10: JTAG2.4 5640.15,2740 R8.1
TX1: P1.2 U1.14 | length 210.8
  Bottom Layer w20: P1.2 5935,4780 6003.73,4711.27 U1.14
USB_D+: R15.2 U2.29 | length 273.4
  Top Layer w10: U2.29 6298.47,3444.66 6395,3348.13 6395,3262.07 R15.2
USB_D-: R13.2 U2.30 | length 336.9
  Top Layer w8: U2.30 6318.15,3451.85 6415,3355 6415,3305 6455.61,3264.39 R13.2
VCC_3V3: C6.1 C7.2 C8.1 C9.1 C10.1 C11.1 C12.1 C13.1 C17.2 C18.2 DS1.1 DS2.1 DS3.1 DS4.1 H1.3 H2.1 JTAG2.5 L1.2 L2.1 MOS1.2 R4.2 R5.2 R6.2 R10.1 R20.1 R21.2 R22.2 R24.2 U2.28 U2.42 U2.54 U2.71 U2.84 U2.96 | length 9923
  Top Layer w8: 5510,4350 5610.09,4350 R24.2 ; C9.1 6305.91,3410.35 6279.47,3436.8 6279.47,3482.79 U2.28 6278.78,3521.11 6356.67,3599 6471.15,3599 6496.3,3573.86 6605,3573.86 ; U2.96 6318.15,4163.15 6343.58,4188.58 C13.1 ; C10.1 6479.09,3379.09 v1(6510,3410) 6535,3410 6554.37,3429.37 U2.42 6556.15,3485.26 6556.15,3525.01 6605,3573.86 ; C8.1 6880,3619.49 6847.38,3619.49 6846.28,3620.59 6791.27,3620.59 U2.54 6733.73,3621.27 ; C12.1 U2.71 6788.81,3954.14 6629.14,3954.14 v1(6625,3950) 6625,3730 6733.73,3621.27 ; 6605,3573.86 6652.42,3621.27 6733.73,3621.27
  Top Layer w10: C11.1 6554.37,4211.94 U2.84 6554.37,4065.63 v1(6575,4045) ; v2(6755,3365) 6785,3335 MOS1.2
  Top Layer w20: 5510,4350 5495,4365 5495,4545 H2.1 ; JTAG2.5 5555,2840 5620,2905 5658.9,2905 R4.2@5684.49,2879.41 ; R22.2 5550,4580.09 H2.1 ; R6.2 5760,2609.91 5760,2803.9 R4.2@5684.49,2879.41 ; v1(5830,4465) 5695,4600 H2.1 ; C17.2 C18.2 ; v1(6210,4395) 6343.58,4261.42 C13.1 6392.07,4205 6540.51,4205 C11.1 ; R5.2 6225.06,4743.96 C18.2 ; v1(6270,4650) 6265,4645 6265,4607.44 ; L2.1 6305.44,4607.44 6265,4607.44 ; R20.1 6565,2568 6565,2982.83 DS3.1 ; v1(6855,2990) 6786.52,3058.48 DS4.1 6713.05,2990 6565,2990 6496.52,3058.48 DS3.1 ; C12.1 6896.22,3940.6 R21.2 ; R10.1 7054.5,3881.71 R21.2 ; H1.3 6995,4291.85 6995,4020 6980,4005 6980,3956.21 R21.2 ; R4.2@5684.49,2879.41 R4.2 5734.27,2887.74 DS1.1 5980,2983.48 6123.48,2983.48 6197.17,3057.17 DS2.1 6260.65,2995 v1(6375,2995) 6425.87,2995 DS3.1 ; C18.2 6265,4607.44
  Bottom Layer w8: v1(6575,4045) 6625,3995 v1(6625,3950)
  Bottom Layer w10: v1(6375,2995) 6375,3220 6494.25,3339.25 6494.25,3394.25 v1(6510,3410)
  Bottom Layer w20: v1(5830,4465) 5900,4395 v1(6210,4395) 6264.25,4449.25 6264.25,4644.25 v1(6270,4650) ; v2(6755,3365) 6755,3080 6930,2905 6930,2792.44 C7.2 7032.5,2607.3 C6.1 7049.8,2554.8 7032.5,2537.5 L1.2
VCC_BLE: JTAG1.5 R1.2 R2.2 R5.1 U1.8 U1.9 | length 1433.6
  Top Layer w20: R5.1 6375,4665 v1(6420,4665) 6437.96,4665 6530,4572.96 6530,4554.86 6604.86,4480 6920,4480 JTAG1.5 7050,4639.49 6894.49,4795 6815,4795 6800,4780 R2.2
  Bottom Layer w20: v1(6420,4665) 6422.96,4667.96 U1.8 U1.9
pads on no net: B1.3 B2.3 BAT1. H1.1 H2.5 H2.6 U1.1 U1.2 U1.12 U1.13 U1.16 U1.17 U1.18 U1.19 U2.1 U2.2 U2.4 U2.7 U2.8 U2.9 U2.12 U2.13 U2.14 U2.19 U2.20 U2.21 U2.32 U2.33 U2.34 U2.35 U2.36 U2.37 U2.38 U2.39 U2.40 U2.43 U2.44 U2.45 U2.46 U2.47 U2.48 U2.51 U2.52 U2.56 U2.57 U2.58 U2.59 U2.60 U2.61 U2.62 U2.63 U2.65 U2.69 U2.70 U2.73 U2.77 U2.78 U2.79 U2.80 U2.81 U2.82 U2.85 U2.86 U2.87 U2.88 U2.89 U2.90 U2.91 U2.92 U2.93 U2.94 U2.95 U2.100 USB1.4 USB1.6 USB1.7 USB1.8 USB1.9 USB1.MH1 USB1.MH2 Y1. Y2.0

## Polygon pours and split planes (outlines as drawn)
GND on Top Layer "Top Layer-No Net" (solid, remove dead copper, pour order 2): 5467.03,2243.39 ccw(c5663.88,2243.39) 5663.88,2046.54 7041.83,2046.54 ccw(c7041.83,2243.39) 7238.68,2243.39 7238.68,4802.44 ccw(c7041.83,4802.44) 7041.83,4999.29 5663.88,4999.29 ccw(c5663.88,4802.44) 5467.03,4802.44
GND on Bottom Layer "Top Layer-No Net" (solid, remove dead copper, pour order 4): 5467.03,2243.39 ccw(c5663.88,2243.39) 5663.88,2046.54 7041.83,2046.54 ccw(c7041.83,2243.39) 7238.68,2243.39 7238.68,4802.44 ccw(c7041.83,4802.44) 7041.83,4999.29 5663.88,4999.29 ccw(c5663.88,4802.44) 5467.03,4802.44

## Keep-outs
Keep-Out Layer:
  lines w0.5: 5467.03,2243.39 ccw(c5663.88,2243.39) 5663.88,2046.54 7041.83,2046.54 ccw(c7041.83,2243.39) 7238.68,2243.39 7238.68,4802.44 ccw(c7041.83,4802.44) 7041.83,4999.29 5663.88,4999.29 ccw(c5663.88,4802.44) 5467.03,4802.44 5467.03,2243.39 ; 88818.36,186222.06 ccw(c89015.21,186222.06) 89015.21,186025.21 90590.01,186025.21 ccw(c90590.01,186222.06) 90786.86,186222.06 90786.86,187796.87 ccw(c90590.01,187796.87) 90590.01,187993.72 89015.21,187993.72 ccw(c89015.21,187796.87) 88818.36,187796.87 88818.36,186222.06

## Silkscreen, mask and mechanical layers (free items; w line width, h text height)
Top Overlay:
  text "Fly_Mouse_Send_2017_3_23" at 5535,2300 h30
Mechanical 2:
  circle w0.25: c5149.8,4877.56 r0.12
  circle w0.25: c7512.01,4877.56 r0.12
  circle w0.25: c7315.16,5074.41 r0.12
  circle w0.25: c5326.91,1739.8 r0.12